# EAGLE board 3outputsrev (EAGLE 5.06)
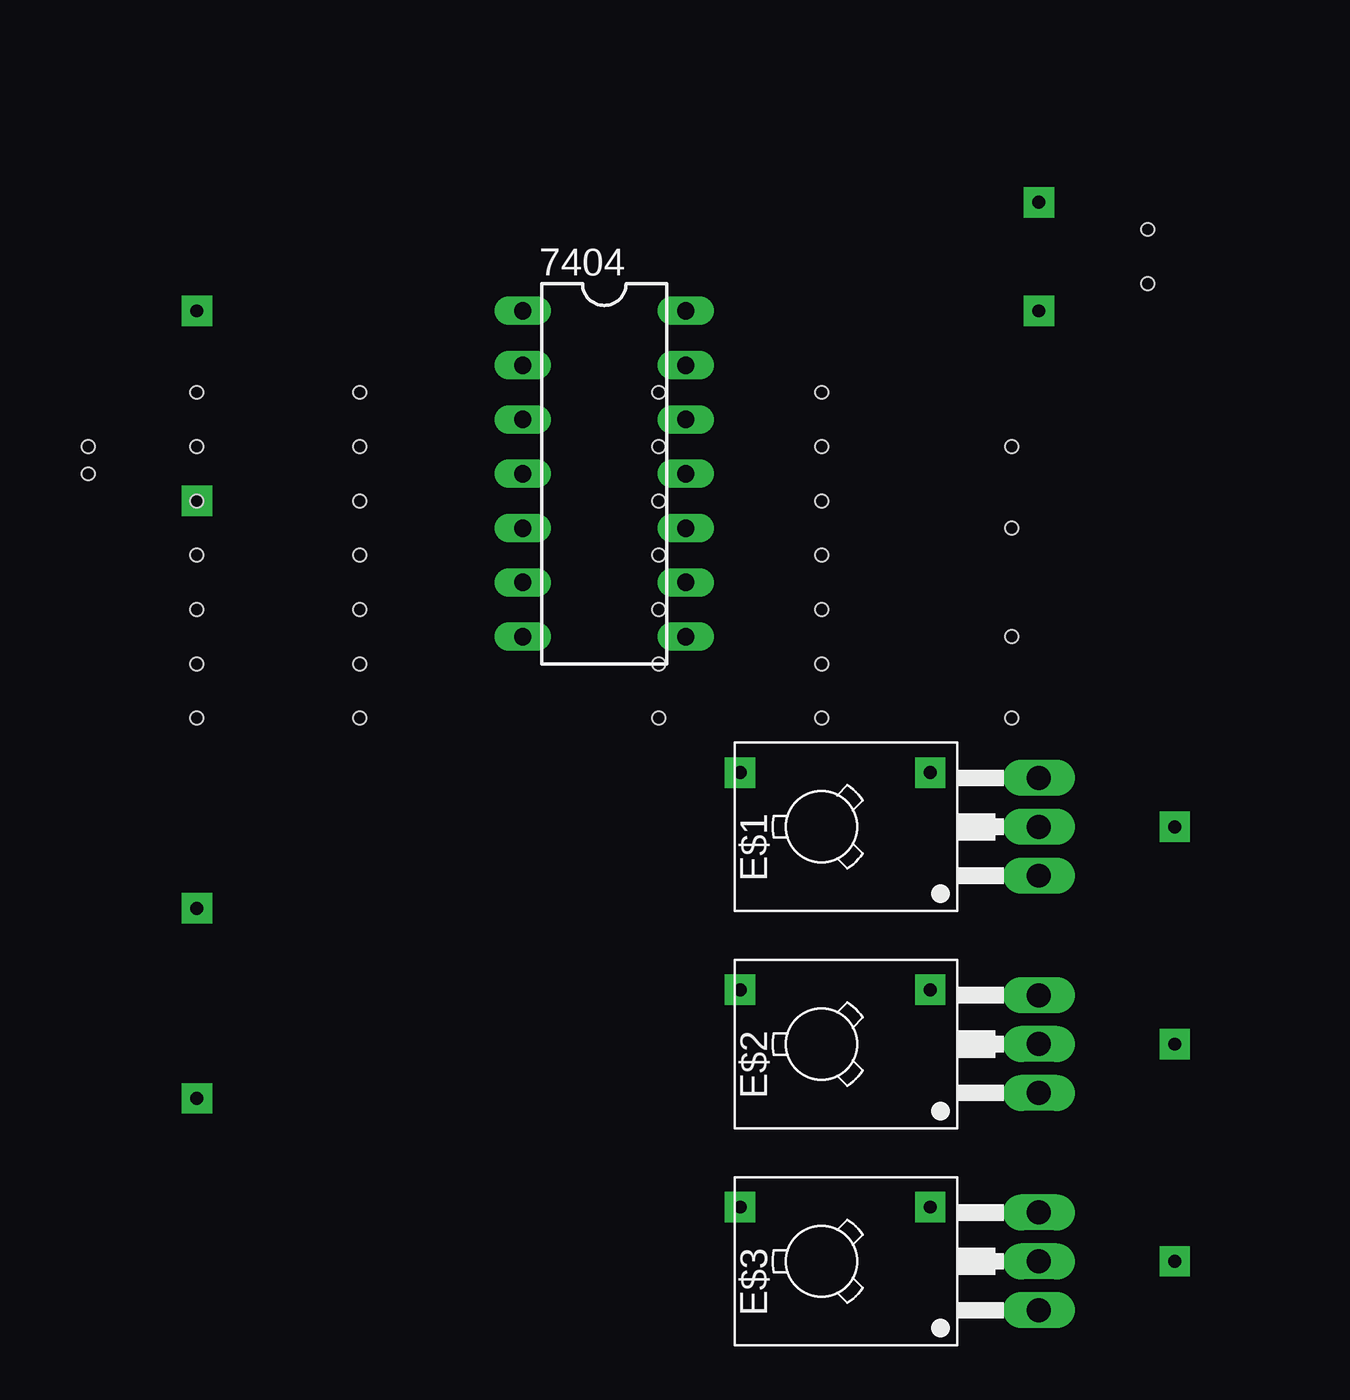
[diagram p0: board, top side]
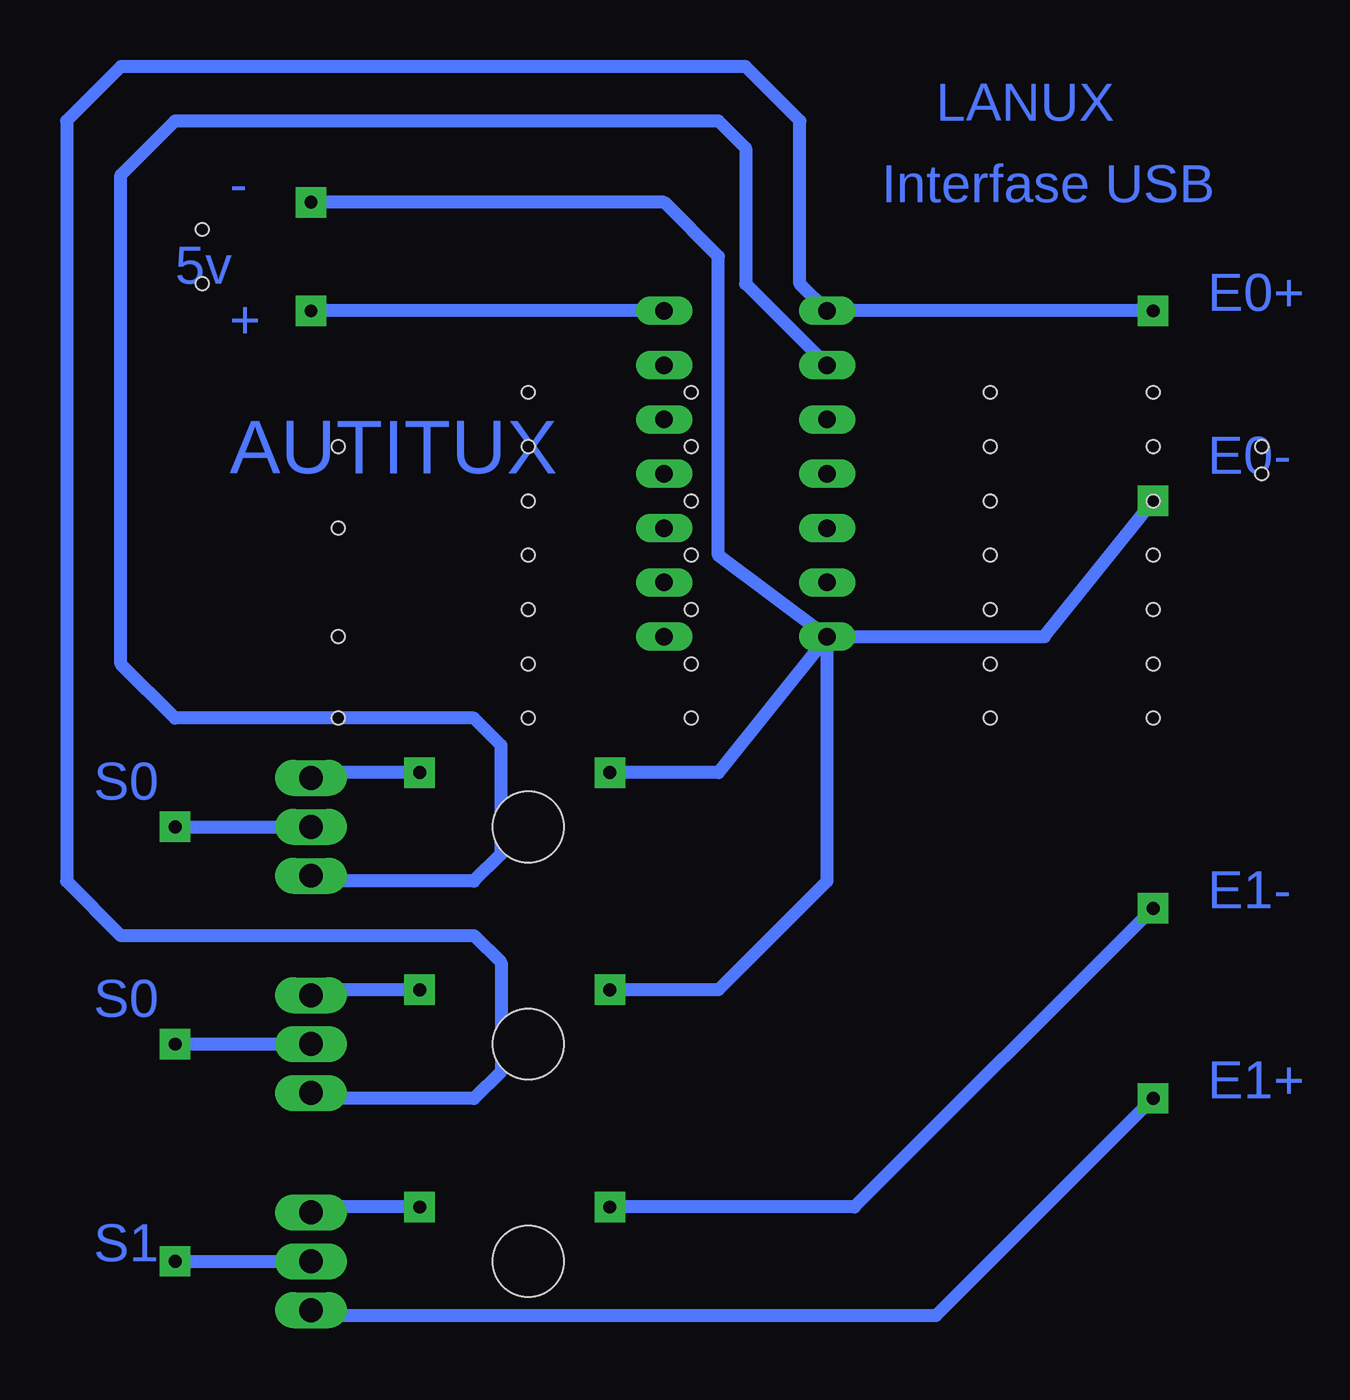
[diagram p1: board, bottom side, seen from below]

No outline drawn. Coordinates in mm, seen from the top.
Copper layers (1*16): Top 0.035mm / dielectric 1.5mm / Bottom 0.035mm
Design rules "default": minimum track width 10mil, minimum drill 24mil, track to track 8mil, track to pad 8mil, pad to pad 8mil, via to via 8mil, smd to smd 8mil, copper to edge 40mil, drill to drill 8mil, minimum pad ring 10mil, minimum via ring 8mil, stop-mask expansion 4mil, vias tented up to drill 0mil, thermal gap 10mil
Holes 0.6 mm at 68.58,29.21 68.58,36.83 68.58,44.45 60.96,44.45 82.55,44.45 82.55,44.45 82.55,41.91 90.17,29.21 60.96,29.21 60.96,31.75 60.96,34.29 60.96,36.83 60.96,39.37 60.96,41.91 60.96,44.45 68.58,41.91 68.58,39.37 68.58,36.83 68.58,34.29 68.58,31.75 68.58,29.21 82.55,29.21 82.55,31.75 82.55,34.29 82.55,36.83 82.55,39.37 90.17,44.45 90.17,41.91 90.17,39.37 90.17,36.83 90.17,34.29 90.17,31.75 90.17,29.21 99.06,29.21 99.06,33.02 99.06,38.1 99.06,38.1 99.06,41.91 105.41,49.53 105.41,52.07 60.96,29.21 55.88,40.64 55.88,41.91

## Footprints (pad centres in the part's own frame; a part is rotated, then mirrored left to right if it is on the bottom)
DIL14 = drill 0.813 long: 1 -7.62,-3.81; 2 -5.08,-3.81; 3 -2.54,-3.81; 4 0,-3.81; 5 2.54,-3.81; 6 5.08,-3.81; 7 7.62,-3.81; 8 7.62,3.81; 9 5.08,3.81; 10 2.54,3.81; 11 0,3.81; 12 -2.54,3.81; 13 -5.08,3.81; 14 -7.62,3.81
TO126 = drill 1.118 long: 1 -2.286,-5.08; 2 0,-5.08; 3 2.286,-5.08 | hole 3.302: 0,5.08

## Placement (x,y rotation side)
7404  [DIL14]  80.01,40.64 270 top
E$1  [TO126]  95.25,24.13 90 top
E$2  [TO126]  95.25,13.97 90 top
E$3  [TO126]  95.25,3.81 90 top

## Library data of the parts
7404 = 74xx-us
E$1-E$3 = transistor-npn

## Nets
S$1: 7404.14
S$4: 7404.7
S$8: 7404.1
S$9: 7404.2
S$10: E$3.2
S$11: E$2.2
S$12: E$1.2

## Tracks (layer width: path | path; a pad name or v marks a point on that pad's centre or on a via)
S$1  (via drill 0.6 pad 1.42)
  Bottom 0.61: 7404.14 v100.33,48.26
S$3  (via drill 0.6 pad 1.42)
  other vias: 60.96,48.26
S$4  (via drill 0.6 pad 1.42)
  Bottom 0.61: v60.96,39.37 66.04,33.02 7404.7 | 7404.7 81.28,26.67 v86.36,26.67 | 7404.7 76.2,21.59 81.28,16.51 v86.36,16.51 | 7404.7 81.28,36.83 81.28,50.8 83.82,53.34 v100.33,53.34
S$5  (via drill 0.6 pad 1.42)
  Bottom 0.61: v60.96,20.32 74.93,6.35 v86.36,6.35
S$6  (via drill 0.6 pad 1.42)
  Bottom 0.61: v60.96,11.43 71.12,1.27 100.33,1.27
S$8
  Bottom 0.61: 60.96,48.26 7404.1 77.47,49.53 77.47,57.15 80.01,59.69 109.22,59.69 111.76,57.15 111.76,21.59 109.22,19.05 92.71,19.05 91.44,17.78 91.44,12.7 92.71,11.43 100.33,11.43
S$9
  Bottom 0.61: 7404.2 80.01,49.53 80.01,55.88 81.28,57.15 106.68,57.15 109.22,54.61 109.22,31.75 106.68,29.21 92.71,29.21 91.44,27.94 91.44,22.86 92.71,21.59 100.33,21.59
S$10  (via drill 0.6 pad 1.42)
  Bottom 0.61: v106.68,3.81 E$3.2
S$11  (via drill 0.6 pad 1.42)
  Bottom 0.61: v106.68,13.97 E$2.2
S$12  (via drill 0.6 pad 1.42)
  Bottom 0.61: v106.68,24.13 E$1.2
S$13  (via drill 0.6 pad 1.42)
  Bottom 0.61: v95.25,16.51 100.33,16.51
S$14  (via drill 0.6 pad 1.42)
  Bottom 0.61: v95.25,6.35 100.33,6.35
S$15  (via drill 0.6 pad 1.42)
  Bottom 0.61: v95.25,26.67 100.33,26.67

## Text on the board
Bottom: LANUX | Interfase USB | - | 5v | E0+ | + | E0- | AUTITUX | S0 | E1- | S0 | E1+ | S1